# EAGLE board potboard (EAGLE 9.6.1)
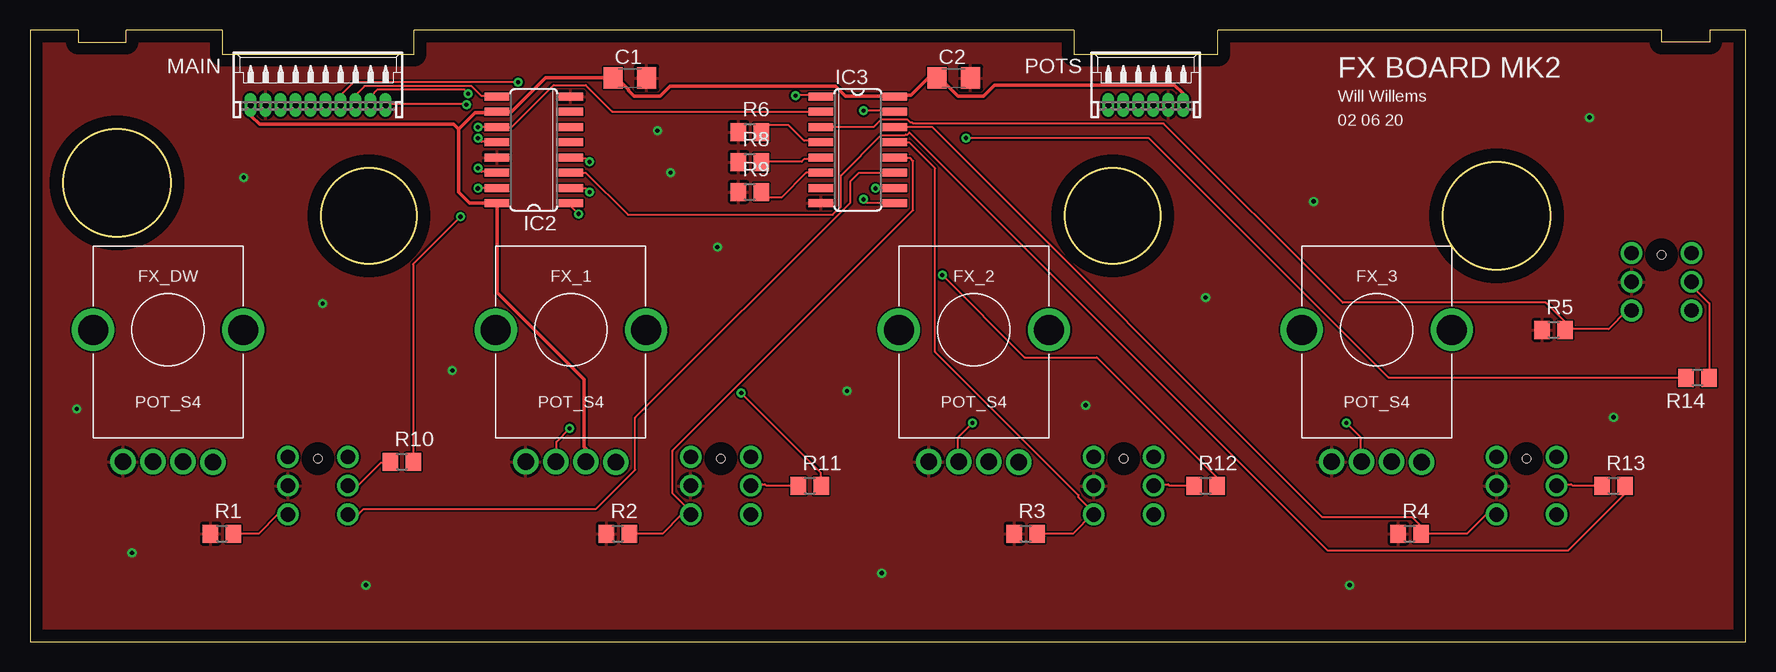
[diagram p0: board, top side]
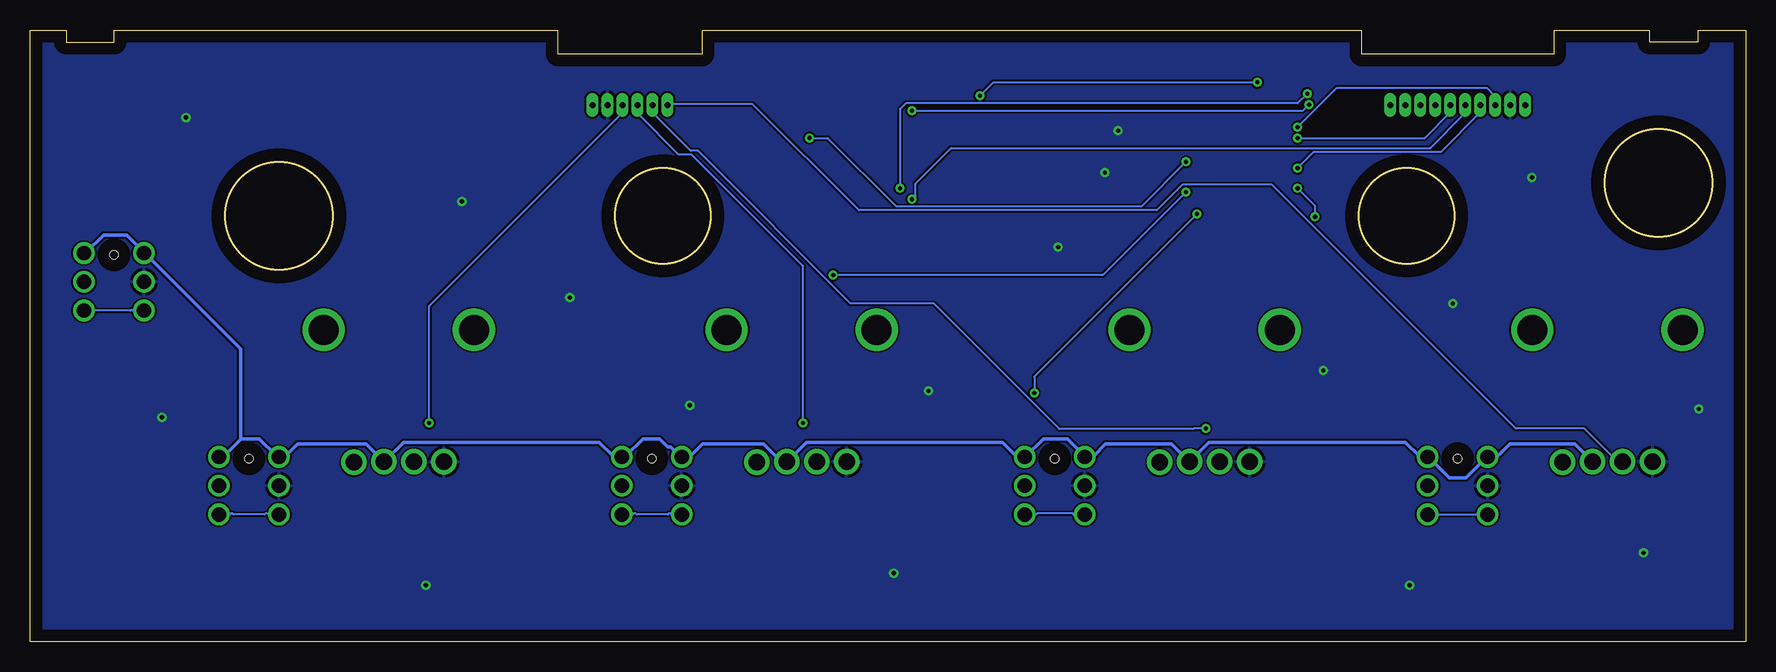
[diagram p1: board, bottom side, seen from below]

Size 143 x 51 mm. Coordinates in mm from the lower left corner, seen from the top.
Outline: 0,0 143,0 143,51 140,51 140,50 136,50 136,51 99,51 99,49 87,49 87,51 32,51 32,49 16,49 16,51 8,51 8,50 4,50 4,51 0,51 0,0
Outline: circle at 122.25,35.5 radius 4.5
Outline: circle at 90.25,35.5 radius 4
Outline: circle at 28.25,35.5 radius 4
Outline: circle at 7.25,38.25 radius 4.5
Copper layers (1*16): Top 0.035mm / dielectric 1.5mm / Bottom 0.035mm
Design rules "default": minimum track width 6mil, minimum drill 0.35mm, track to track 6mil, track to pad 6mil, pad to pad 6mil, via to via 6mil, smd to smd 6mil, copper to edge 40mil, drill to drill 6mil, minimum pad ring 10mil, minimum via ring 8mil, stop-mask expansion 4mil, vias tented up to drill 0mil, thermal gap 10mil
Net classes: 1 power: width 0.102 mm

## Footprints (pad centres in the part's own frame; a part is rotated, then mirrored left to right if it is on the bottom)
C1206 = smd 1.6 x 1.8: 1 -1.4,0; 2 1.4,0
POT_S4 = drill 1.4: DUMMY 3.75,-11.05; GND -3.75,-11; SIGNAL -1.25,-11; VCC 1.25,-11 | drill 2.5: MOUNT-L -6.25,0; MOUNT-R 6.26,0
SO16 = smd 0.66 x 2.032: 1 -4.445,-3.073; 2 -3.175,-3.073; 3 -1.905,-3.073; 4 -0.635,-3.073; 5 0.635,-3.073; 6 1.905,-3.073; 7 3.175,-3.073; 8 4.445,-3.073; 9 4.445,3.073; 10 3.175,3.073; 11 1.905,3.073; 12 0.635,3.073; 13 -0.635,3.073; 14 -1.905,3.073; 15 -3.175,3.073; 16 -4.445,3.073
53048-10 = drill 0.5 pad 0.698 long: 1 5.625,-1.25; 2 4.375,-1.25; 3 3.125,-1.25; 4 1.875,-1.25; 5 0.625,-1.25; 6 -0.625,-1.25; 7 -1.875,-1.25; 8 -3.125,-1.25; 9 -4.375,-1.25; 10 -5.625,-1.25
53048-06 = drill 0.5 pad 0.698 long: 1 3.125,-1.25; 2 1.875,-1.25; 3 0.625,-1.25; 4 -0.625,-1.25; 5 -1.875,-1.25; 6 -3.125,-1.25
R0805 = smd 1.3 x 1.5: 1 -0.95,0; 2 0.95,0
BUTTON_S4 = drill 1.2: L1 -2.5,-2.4; L2 2.5,-2.4; LED+ 2.5,0; LED- -2.5,0; R1 -2.5,2.4; R2 2.5,2.4 | hole 0.7: 0,2.25

## Placement (x,y rotation side)
C1  [C1206]  50,47 0 top
C2  [C1206]  77,47 0 top
FX_1  POT_S4  [POT_S4]  45.08,26 0 top
FX_2  POT_S4  [POT_S4]  78.67,26 0 top
FX_3  POT_S4  [POT_S4]  112.25,26 0 top
FX_DW  POT_S4  [POT_S4]  11.5,26 0 top
IC2  74HC595D  [SO16]  42,41 90 top
IC3  74HC165D  [SO16]  69,41 270 top
MAIN  53048-10  [53048-10]  24,46 0 top
POTS  53048-06  [53048-06]  93,46 0 top
R1  10K  [R0805]  16,9 0 top
R2  10K  [R0805]  49,9 0 top
R3  10K  [R0805]  83,9 0 top
R4  10K  [R0805]  115,9 0 top
R5  10K  [R0805]  127,26 0 top
R6  10K  [R0805]  60,42.5 0 top
R8  10K  [R0805]  60,40 0 top
R9  10K  [R0805]  60,37.5 0 top
R10  51  [R0805]  31,15 0 top
R11  51  [R0805]  65,13 0 top
R12  51  [R0805]  98,13 0 top
R13  51  [R0805]  132,13 0 top
R14  51  [R0805]  139,22 180 top
U$1  BUTTON_S4  [BUTTON_S4]  24,13 0 top
U$2  BUTTON_S4  [BUTTON_S4]  57.58,13 0 top
U$3  BUTTON_S4  [BUTTON_S4]  91.17,13 0 top
U$4  BUTTON_S4  [BUTTON_S4]  124.75,13 0 top
U$5  BUTTON_S4  [BUTTON_S4]  136,30 0 top

## Library data of the parts
C1 C2 = adafruit
FX_1-FX_3 FX_DW U$1-U$5 = S4
IC2 IC3 = 74xx-eu
MAIN = con-molex; MF: MOLEX; MPN: 53048-1010; OC_FARNELL: 9733108; OC_NEWARK: 98K9838
POTS = con-molex; MF: WALDOM/MOLEX; MPN: 53048-0610; OC_FARNELL: 1012260; OC_NEWARK: 38C9911
R1-R6 R8-R14 = rcl; SPICEPREFIX: R

## Nets
GND: C1.2 C2.2 FX_1.GND FX_2.GND FX_3.GND FX_DW.GND IC2.8 IC2.13 IC3.8 MAIN.9 POTS.2 R1.1 R2.1 R3.1 R4.1 R5.1 R6.1 R8.1 R9.1 U$1.LED- U$2.LED- U$3.LED- U$4.LED- U$5.LED-
N$1: IC2.4 R14.2
N$2: FX_DW.SIGNAL POTS.6
N$3: FX_1.SIGNAL POTS.5
N$4: FX_2.SIGNAL POTS.4
N$5: IC3.11 R1.2 U$1.L1 U$1.L2
N$6: IC3.12 R2.2 U$2.L1 U$2.L2
N$7: IC3.13 R3.2 U$3.L1 U$3.L2
N$8: IC3.14 R4.2 U$4.L1 U$4.L2
N$9: IC3.3 R5.2 U$5.L1 U$5.L2
N$10: IC2.3 R13.2
N$11: IC2.2 R12.2
N$12: IC2.1 R11.2
N$13: R10.1 U$1.LED+
N$14: FX_3.SIGNAL POTS.3
N$15: IC2.11 IC3.2 MAIN.8
N$16: IC3.6 R9.2
N$17: IC3.5 R8.2
N$18: IC3.4 R6.2
N$19: IC3.10 MAIN.2
N$20: IC2.15 R10.2
N$21: R11.1 U$2.LED+
N$22: R12.1 U$3.LED+
N$23: R13.1 U$4.LED+
N$24: R14.1 U$5.LED+
N$25: IC2.14 MAIN.7
N$26: IC2.9 MAIN.3
N$27: IC2.12 MAIN.5
N$28: IC3.1 MAIN.4
N$29: IC3.9 MAIN.6
N$30: IC3.15 MAIN.1
VCC [power]: C1.1 C2.1 FX_1.VCC FX_2.VCC FX_3.VCC FX_DW.VCC IC2.10 IC2.16 IC3.16 MAIN.10 POTS.1 U$1.R1 U$1.R2 U$2.R1 U$2.R2 U$3.R1 U$3.R2 U$4.R1 U$4.R2 U$5.R1 U$5.R2

## Tracks (layer width: path | path; a pad name or v marks a point on that pad's centre or on a via)
GND  (via drill 0.35)
  other vias: 57.3,32.9 53.4,39.1 52.3,42.6 17.8,38.7 3.9,19.4 8.5,7.4 28,4.7 35.2,22.6 24.4,28.2 68.1,20.9 71,5.7 88,19.7 98,28.7 107,36.7 110,4.7 130,43.7 132,18.7
  pour Bottom: 0,0 143,0 143,51 0,51
  pour Top: 0,0 143,0 143,51 0,51
N$1  (via drill 0.35)
  Top 0.152: v78.03,42 93.26,42 113.23,22.02 138,22.02 R14.2 | v46.63,40.01 46.33,40.31 45.11,40.31 IC2.4
  Bottom 0.152: v78.03,42 76.51,42 70.79,36.27 50.37,36.27 v46.63,40.01
N$2
  Bottom 0.152: POTS.6 89.84,44.81 82.75,44.81 73.91,35.97 49.07,35.97 46.94,38.1 39.47,38.1 19.14,17.76 13.42,17.76 10.67,15.01 10.29,15.01 FX_DW.SIGNAL
N$3  (via drill 0.35)
  Top 0.152: v44.99,17.76 43.89,16.66 43.89,15.01 FX_1.SIGNAL
  Bottom 0.152: v44.99,17.76 45.99,17.76 46.03,17.72 57.19,17.72 67.67,28.19 74.6,28.19 87.33,40.92 87.94,40.92 91.06,44.04 91.06,44.73 POTS.5
N$4  (via drill 0.35)
  Top 0.152: v78.56,18.22 77.34,17 77.34,15.01 FX_2.SIGNAL
  Bottom 0.152: v78.56,18.22 78.56,31.32 87.86,40.62 88.92,40.62 92.35,44.04 92.35,44.73 POTS.4
N$5
  Top 0.152: R1.2 16.99,8.99 19.05,8.99 20.65,10.59 21.49,10.59 U$1.L1 | IC3.11 72.01,39.09 69.09,39.09 68.39,38.39 68.39,36.61 50.44,18.67 50.44,14.33 47.17,11.05 27.81,11.05 27.36,10.59 26.52,10.59 U$1.L2
  Bottom 0.152: U$1.L1 21.57,10.59 26.44,10.59 U$1.L2
N$6
  Top 0.152: 54.63,10.59 55.02,10.59 U$2.L1 54.63,10.59 | 54.63,10.59 54.33,10.59 52.73,8.99 49.99,8.99 R2.2 | 54.63,10.59 54.63,11.28 53.57,12.34 53.57,15.93 73.61,35.97 73.61,40.08 73.38,40.31 72.08,40.31 IC3.12
  Bottom 0.152: U$2.L2 60.05,10.59 59.13,10.59 59.05,10.67 56.08,10.67 55.93,10.52 55.17,10.52 55.09,10.59 U$2.L1
N$7
  Top 0.152: R3.2 83.97,8.99 86.94,8.99 88.62,10.67 U$3.L1 88.62,10.74 88.62,10.82 87.4,12.04 87.4,12.19 75.44,24.16 75.44,39.47 73.3,41.6 72.08,41.6 IC3.13
  Bottom 0.152: U$3.L2 93.65,10.59 92.73,10.59 92.66,10.67 92.51,10.67 92.43,10.59 89.84,10.59 89.76,10.67 89.61,10.67 89.53,10.59 88.7,10.59 U$3.L1
N$8
  Top 0.152: U$4.L1 122.22,10.59 121.39,10.59 119.79,8.99 115.98,8.99 R4.2 115.9,9.07 115.9,9.68 115.21,10.36 107.75,10.36 75.21,42.9 72.08,42.9 IC3.14
  Bottom 0.152: U$4.L2 127.18,10.59 126.34,10.59 126.26,10.67 126.11,10.67 126.03,10.59 123.44,10.59 123.37,10.67 123.22,10.67 123.14,10.59 122.3,10.59 U$4.L1
N$9
  Top 0.152: U$5.L1 133.43,27.58 133.12,27.58 131.6,26.06 128.02,26.06 R5.2 128.02,26.14 128.02,26.59 126.34,28.27 109.42,28.27 94.49,43.2 73.61,43.2 73.53,43.28 73.38,43.28 73.15,43.51 70.94,43.51 70.33,42.9 65.99,42.9 IC3.3
  Bottom 0.152: U$5.L2 138.46,27.58 134.65,27.58 134.57,27.66 134.49,27.66 134.34,27.51 133.58,27.51 133.5,27.58 U$5.L1
N$10
  Top 0.152: R13.2 132.89,12.95 132.89,12.27 128.25,7.62 108.13,7.62 73.3,42.44 73.15,42.29 73,42.29 72.92,42.22 70.94,42.22 67.59,38.86 67.59,36.27 66.9,35.59 49.84,35.59 46.33,39.09 45.11,39.09 IC2.3
N$11  (via drill 0.35)
  Top 0.152: v76.05,30.56 82.91,23.7 88.92,23.7 98.91,13.72 98.91,13.03 R12.2 | v46.63,37.49 46.33,37.8 45.11,37.8 IC2.2
  Bottom 0.152: v76.05,30.56 53.57,30.56 v46.63,37.49
N$12  (via drill 0.35)
  Top 0.152: v59.28,20.73 65.91,14.1 65.91,13.03 R11.2 | v45.72,35.66 45.03,36.35 45.03,36.5 IC2.1
  Bottom 0.152: v59.28,20.73 59.28,22.1 v45.72,35.66
N$13
  Top 0.152: R10.1 30.02,14.94 29.26,14.94 27.36,13.03 26.52,13.03 U$1.LED+
N$14  (via drill 0.35)
  Top 0.152: v109.73,18.22 110.95,17 110.95,15.01 FX_3.SIGNAL
  Bottom 0.152: v109.73,18.22 109.73,27.96 93.65,44.04 93.65,44.73 POTS.3
N$15  (via drill 0.35)
  Top 0.152: v37.34,42.9 38.86,42.9 IC2.11 40.16,42.9 43.66,46.41 46.33,46.41 48.54,44.2 65.91,44.2 IC3.2
  Bottom 0.152: v37.34,42.9 34.06,46.18 21.57,46.18 20.88,45.49 20.88,44.81 MAIN.8
N$16
  Top 0.152: R9.2 61.09,37.03 62.64,37.03 64.69,39.09 65.91,39.09 IC3.6
N$17
  Top 0.152: R8.2 64.31,40.01 64.54,40.23 65.84,40.23 65.91,40.31 IC3.5
N$18
  Top 0.152: R6.2 61.05,43.05 63.25,43.05 64.54,41.76 65.84,41.76 65.91,41.68 IC3.4
N$19  (via drill 0.35)
  Top 0.152: v36.53,45.69 36.2,46.02 28.96,46.02 28.42,45.49 28.42,44.81 MAIN.2 | v70.48,37.8 72.01,37.8 IC3.10
  Bottom 0.152: v36.53,45.69 37.34,44.88 70,44.88 70.48,44.4 v70.48,37.8
N$20  (via drill 0.35)
  Top 0.152: v35.88,35.42 31.93,31.47 31.93,15.01 R10.2 | v37.34,37.8 38.86,37.8 IC2.15
  Bottom 0.152: v35.88,35.42 35.88,36.34 v37.34,37.8
N$21
  Top 0.152: R11.1 64.01,13.03 61.34,13.03 61.27,13.11 61.04,13.11 60.96,13.03 60.12,13.03 U$2.LED+
N$22
  Top 0.152: R12.1 97,13.03 94.94,13.03 94.87,13.11 93.8,13.11 93.73,13.03 U$3.LED+
N$23
  Top 0.152: R13.1 130.99,13.03 128.55,13.03 128.47,13.11 127.33,13.11 127.25,13.03 U$4.LED+
N$24
  Top 0.152: R14.1 139.98,22.02 139.98,28.19 138.53,29.64 138.53,29.95 U$5.LED+
N$25  (via drill 0.35)
  Top 0.152: v37.34,39.47 37.64,39.17 38.86,39.17 IC2.14
  Bottom 0.152: v37.34,39.47 35.97,40.84 25.38,40.84 22.17,44.04 22.17,44.73 MAIN.7
N$26
  Top 0.152: MAIN.3 27.13,44.81 27.13,45.57 27.89,46.33 36.8,46.33 37.64,45.49 38.86,45.49 IC2.9
N$27  (via drill 0.35)
  Top 0.152: v37.34,41.99 37.64,41.68 38.86,41.68 IC2.12
  Bottom 0.152: v37.34,41.99 26.75,41.99 24.69,44.04 24.69,44.73 MAIN.5
N$28  (via drill 0.35)
  Top 0.152: v40.68,46.63 26.98,46.63 25.91,45.57 25.91,44.81 MAIN.4 | v63.81,45.52 63.86,45.57 65.84,45.57 65.91,45.49 IC3.1
  Bottom 0.152: v40.68,46.63 62.7,46.63 v63.81,45.52
N$29  (via drill 0.35)
  Top 0.152: v69.48,36.88 69.79,36.58 72.01,36.58 IC3.9
  Bottom 0.152: MAIN.6 23.39,44.73 23.39,44.04 26.29,41.15 66.22,41.15 69.18,38.18 69.18,37.18 v69.48,36.88
N$30  (via drill 0.35)
  Top 0.152: v36.38,44.77 36.35,44.81 29.64,44.81 MAIN.1 | v69.48,44.27 71.93,44.27 72.01,44.2 IC3.15
  Bottom 0.152: v69.48,44.27 36.88,44.27 v36.38,44.77
VCC
  Top 0.152: 74.83,46.94 75.59,46.94 C2.1 75.67,46.94 75.89,46.94 | 72.16,45.57 72.08,45.49 IC3.16 72.01,45.49 | 96.09,44.81 POTS.1 | 48.54,47.02 C1.1 48.62,46.94 49,46.94 | 38.94,44.2 IC2.10 38.86,44.12 | 34.69,43.17 34.65,43.13 | 18.44,44.73 MAIN.10 | 38.86,36.58 IC2.16 38.94,36.5 | 49.91,46.02 49.91,45.95 | 46.41,15.01 FX_1.VCC
  Top 0.305: 74.83,46.94 73.46,45.57 72.16,45.57 | 96.09,44.81 96.09,45.72 95.4,46.41 80.39,46.41 79.48,45.49 77.34,45.49 75.89,46.94 | 48.54,47.02 42.98,47.02 40.16,44.2 38.94,44.2 | 18.44,44.73 18.44,43.81 19.13,43.13 34.65,43.13 35.33,43.13 35.73,42.73 | 38.86,36.58 36.64,36.58 35.73,37.49 35.73,42.73 | 72.01,45.49 67.97,45.49 67.13,46.33 53.34,46.33 52.5,45.49 50.37,45.49 49.91,45.95 | 49,46.94 49.91,46.02 | 38.94,36.5 38.94,29.11 46.18,21.87 46.18,16.23 46.41,16 46.41,15.01 | 35.73,42.73 37.12,44.12 38.86,44.12
  Bottom 0.152: 138.3,32.46 138.46,32.46 U$5.R2 | 133.5,32.46 U$5.R1 133.43,32.38 | 122.45,15.47 122.3,15.47 U$4.R1 122.22,15.47 | 125.35,16.92 125.39,16.88 125.42,16.92 | 127.18,15.47 U$4.R2 | 113.54,15.01 FX_3.VCC 113.46,15.01 | 88.85,15.47 88.7,15.47 U$3.R1 88.62,15.47 | 93.65,15.47 U$3.R2 | 79.93,15.01 FX_2.VCC 79.86,15.01 | 21.57,15.39 U$1.R1 21.49,15.47 | 26.44,15.39 U$1.R2 26.52,15.47 | 12.8,15.01 FX_DW.VCC | 55.09,15.47 U$2.R1 55.02,15.47 | 60.05,15.39 U$2.R2 60.12,15.47 | 46.41,15.01 FX_1.VCC
  Bottom 0.305: 133.5,32.46 134.95,33.91 136.85,33.91 138.3,32.46 | 122.45,15.47 123.9,16.92 125.35,16.92 | 125.39,16.88 126.8,15.47 127.18,15.47 | 113.54,15.01 114.99,16.46 120.7,16.46 121.69,15.47 122.22,15.47 | 133.43,32.38 125.42,24.38 125.42,16.92 | 88.85,15.47 89.61,16.23 89.84,16.23 90.53,16.92 91.9,16.92 93.34,15.47 93.65,15.47 | 79.93,15.01 80.39,15.01 81.84,16.46 86.94,16.46 87.94,15.47 88.62,15.47 | 21.57,15.39 23.32,13.64 24.69,13.64 26.44,15.39 | 12.8,15.01 14.25,16.46 19.66,16.46 20.65,15.47 21.49,15.47 | 55.09,15.47 56.54,16.92 58.52,16.92 60.05,15.39 | 46.41,15.01 47.85,16.46 53.34,16.46 54.33,15.47 55.02,15.47 | 26.52,15.47 27.2,15.47 28.35,16.61 44.73,16.61 FX_1.VCC | 79.86,15.01 78.26,16.61 61.95,16.61 60.81,15.47 60.12,15.47 | 113.46,15.01 111.86,16.61 95.56,16.61 94.41,15.47 93.73,15.47 U$3.R2

## Text on the board
tNames: FX BOARD MK2 | Will Willems | 02 06 20